# Altium PCB motherboard_ERC.PcbDoc
Units mm, origin at the board's own origin, x right, y up, seen from the top; angles counter-clockwise.
Board outline 153 x 126 mm, 2 copper layers (Top Layer, Bottom Layer); 17 components, 70 nets, 210 pads, 33 vias.
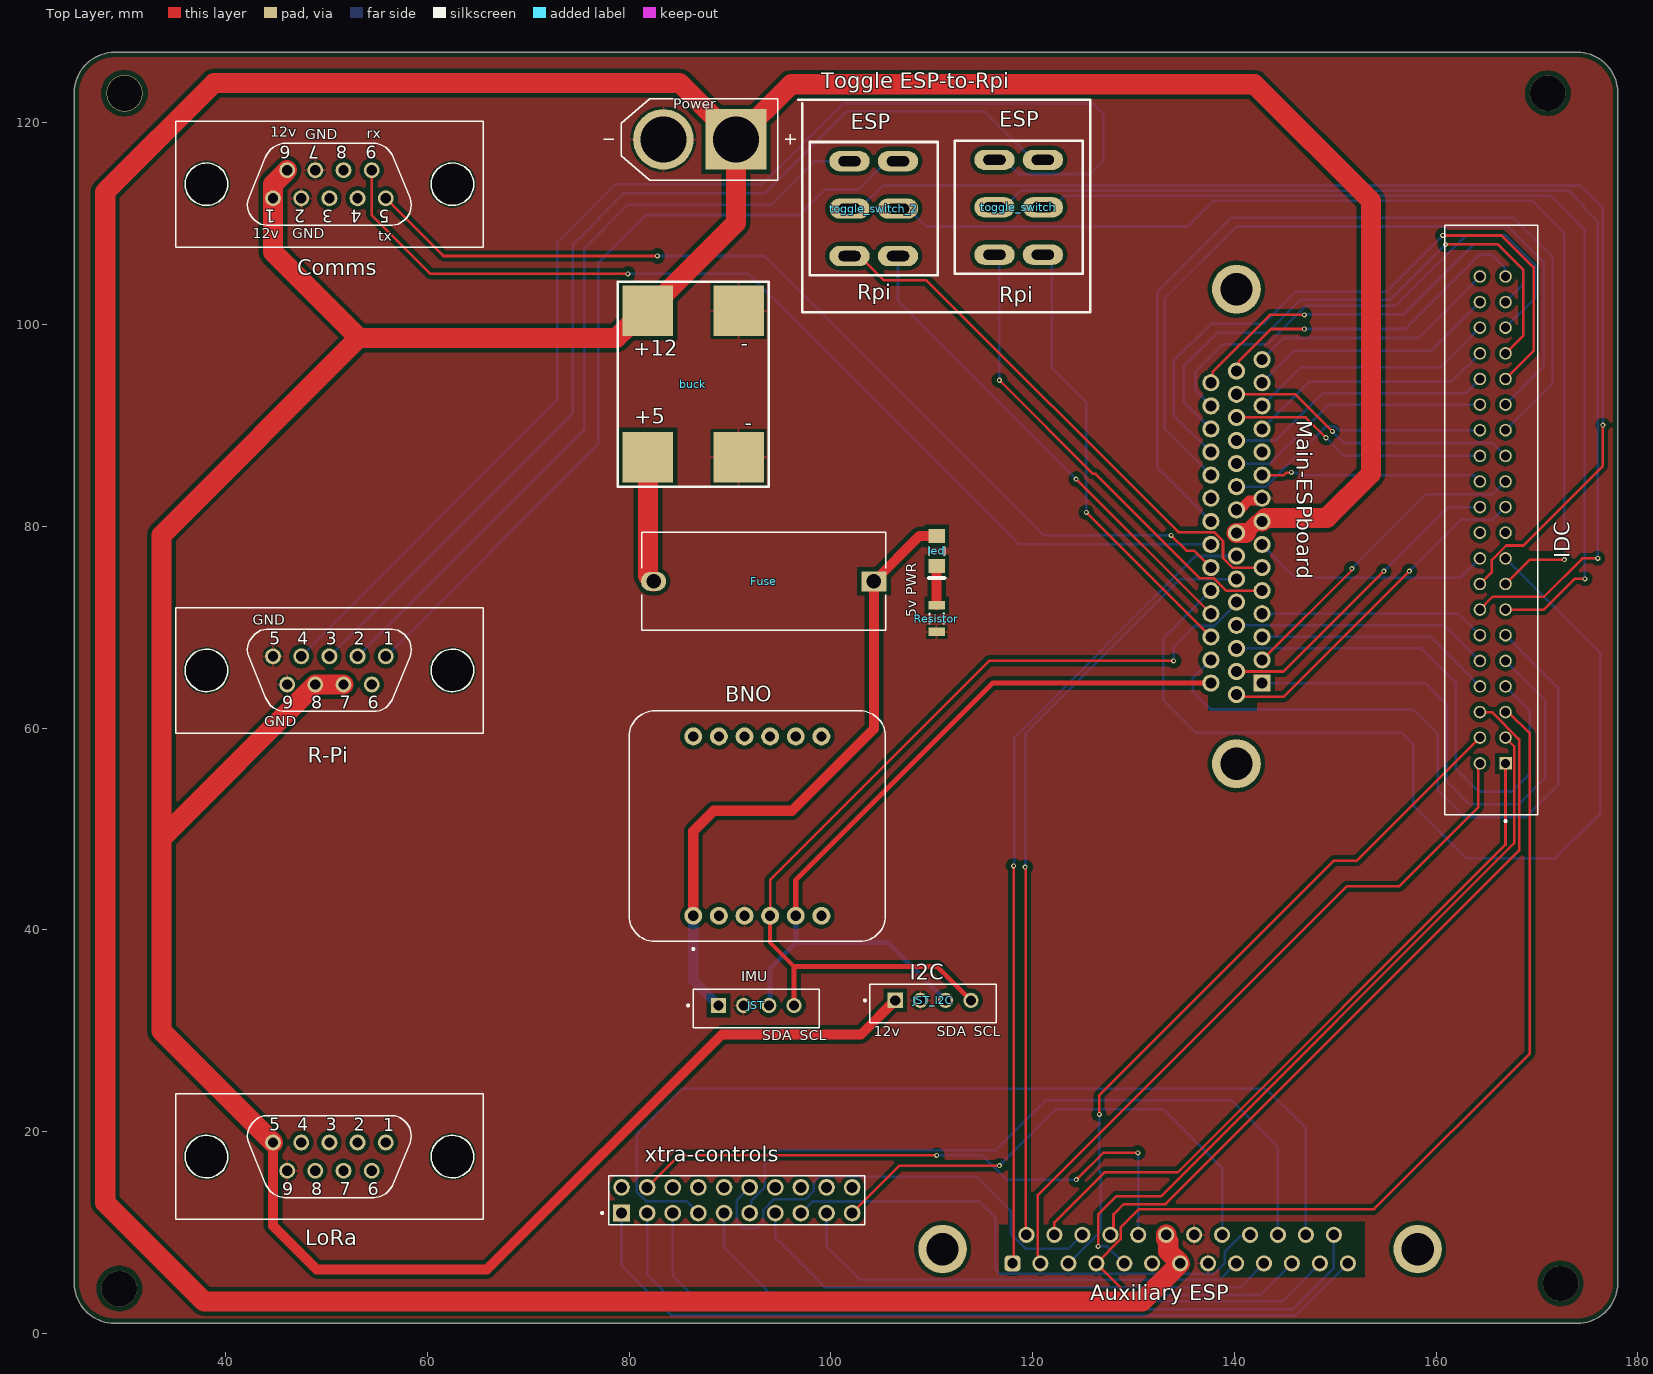
[diagram p0: Top Layer view]
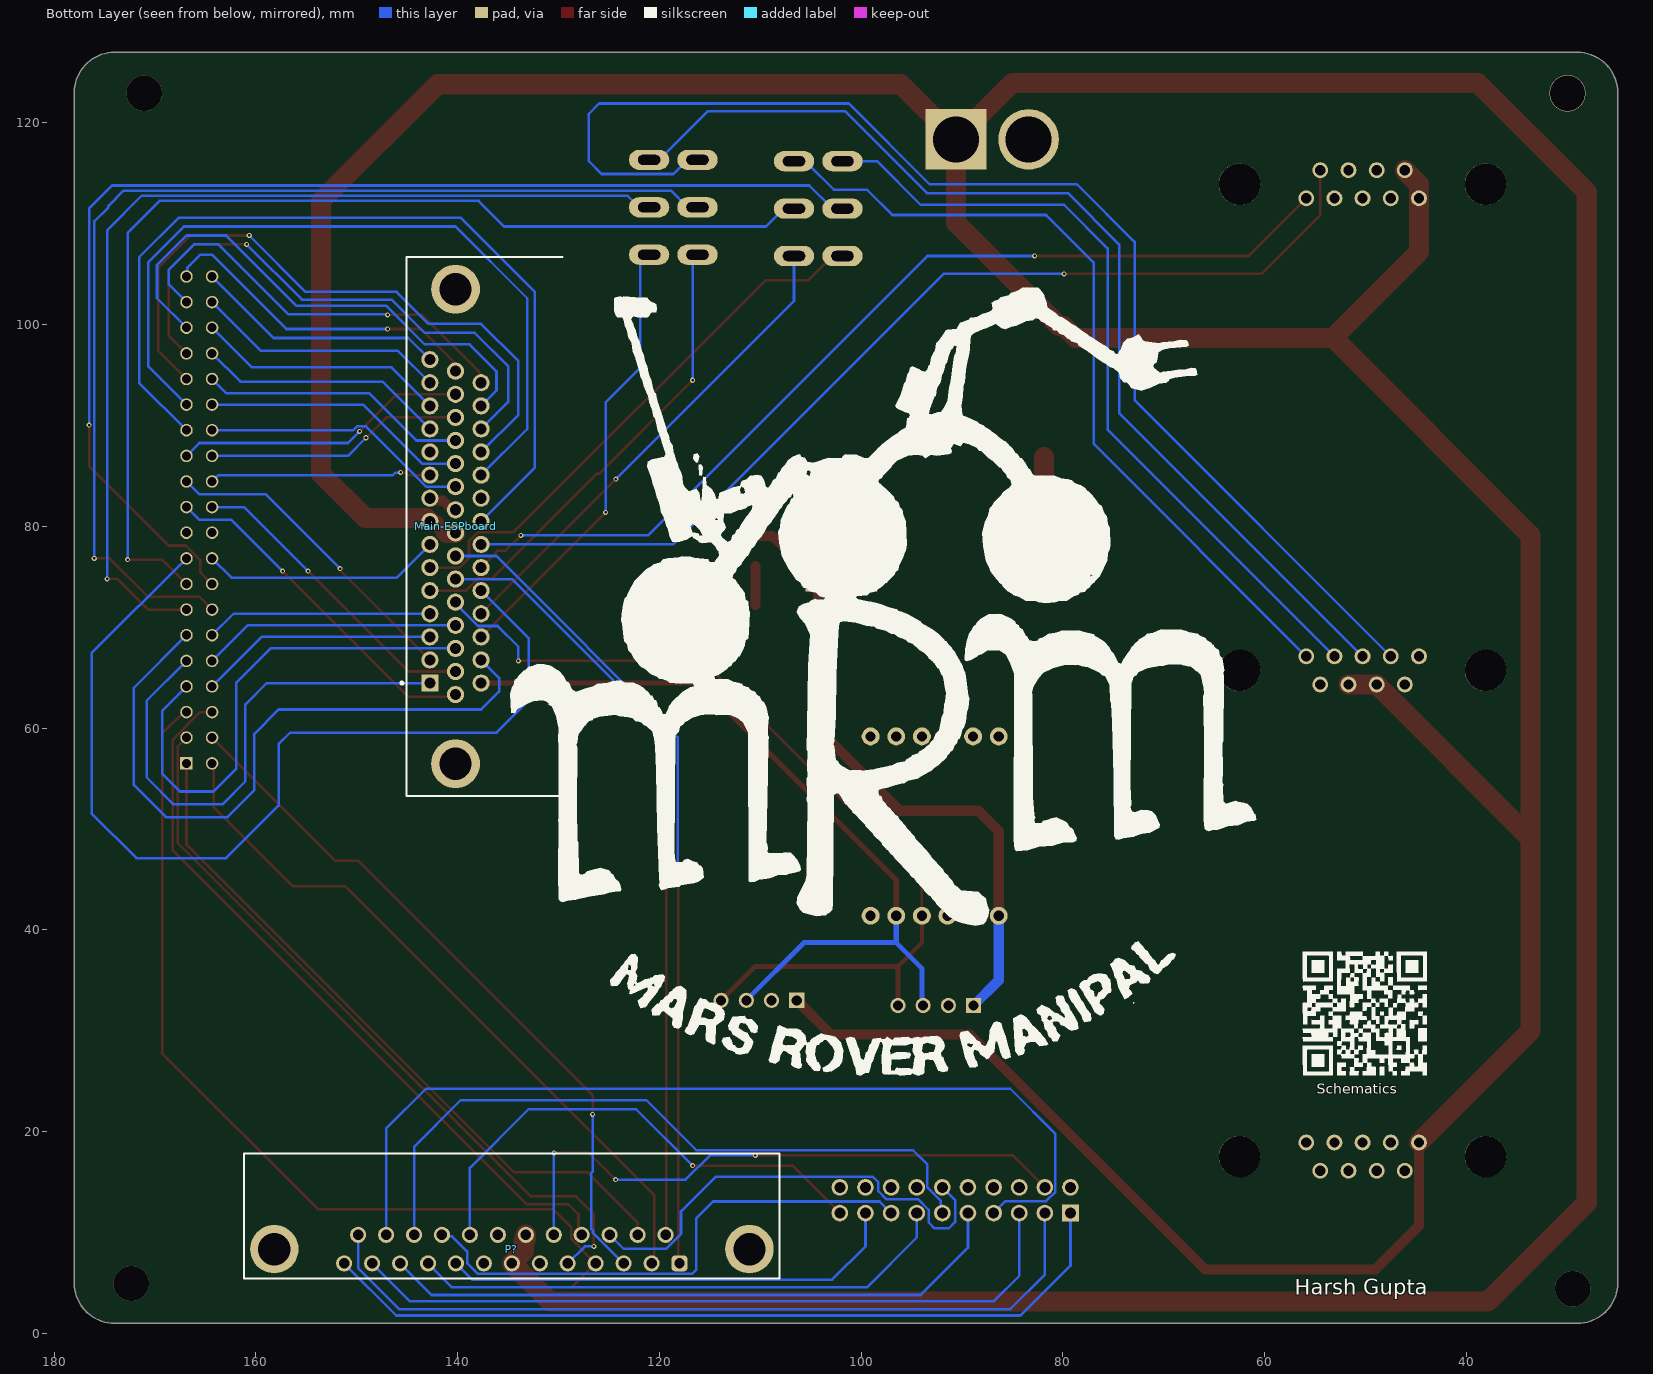
[diagram p1: Bottom Layer view, seen from below]

## Layer stack, top to bottom
Top Solder: solder mask 0.0102, Solder Resist, Dk 3.5
Top Layer: signal copper 0.0356
Dielectric 1: dielectric 0.32, FR-4, Dk 4.8
Bottom Layer: signal copper 0.0356
Bottom Solder: solder mask 0.0102, Solder Resist, Dk 3.5

## Board outline
25,5 ccw(c29,5) 29,1 174,1 ccw(c174,5) 178,5 178,123 ccw(c174,123) 174,127 29,127 ccw(c29,123) 25,123

## Design rules (kind name [scope] priority, off if disabled: settings)
Clearance [All] p1: gap=0.254 ignorepadtopadclearanceinfootprint=FALSE except(0.1: Arc-THPad Arc-Via Track-THPad Track-Via; 0.4: Arc-Fill Arc-Poly Arc-Region Track-Fill Track-Poly Track-Region SMDPad-Fill SMDPad-Poly SMDPad-Region THPad-Fill THPad-Poly THPad-Region; 0.5: Via-Fill Via-Poly Via-Region)
PolygonConnect [All] p1: connectstyle=Relief reliefconductorwidth=0.254 reliefentries=4 polygonreliefangle="90 Angle" airgapwidth=0.254
RoutingVias [All] p1: holewidth=0.711 width=1.27 viastyle="Through Hole" minholewidth=0.711 minwidth=1.27 maxholewidth=0.711 maxwidth=1.27
SolderMaskExpansion [All] p1: expansion=0.102 istentingtop=FALSE
SupplyNets "Schematic Supply Nets_1" [InNet('+12')] p1: voltage=0.000
SupplyNets "Schematic Supply Nets" [InNet('GND')] p2: voltage=0.000
Width [All] p1: maxlimit=2 minlimit=0.254 preferedwidth=0.254
30 further rules are at their usual default settings.

## Components (designator, comment, footprint, x,y, rotation, side; value= is the part's Value field where it differs from the comment)
BNO "4754" MODULE_4754 92.71,50.292 r0 top
buck "microbuck" "Micro buck" 86.36,94.107 r0 top
Comms "DB9F" D-09F 50.292,113.919 r180 top
Fuse "4527" FUSE_4527 93.345,74.549 r180 top
IDC "3-1761603-3" TE_3-1761603-3 166.878,56.515 r90 top
JST "IMU" JST_B4B-EH-A 92.603,32.512 r0 top
JST_I2C "IMU" JST_B4B-EH-A 110.129,33.02 r0 top
led "597-3311-407F" DIAL-597-3311-407F_V 110.49,77.563 r270 top
LoRa "DB9F" D-09F 50.292,17.526 r0 top
Main-ESPboard "L717HDB44PD1CH4F" FP-L717HDB44PD1CH4F-MFG 133.828,79.992 r90 bottom
P? "618025231221" 618025231221 134.625,11.659 r0 bottom
Power "XT60-M" AMASS_XT60-M 86.995,118.364 r180 top
R-Pi "DB9F" D-09F 50.292,65.722 r0 top
Resistor "RC1206FR-07120RL" RESC3116X65X40LL10T20 110.49,70.866 r270 top
toggle_switch "toggle switch" "toggle switch" 118.618,111.633 r180 top
toggle_switch_2 "toggle switch" "toggle switch" 104.254,111.505 r180 top
xtra-controls "10119109-920010LF" AMPHENOL_10119109-920010LF 90.678,13.208 r0 top

## Footprints (in the part's own frame and the unit in brackets; to place one, negate y for a bottom-side part, rotate by r counter-clockwise, add the part's x,y. Pads: shape width x height; smd on the part's side, far side on the other; paste and mask are expansions set on the pad)
618025231221 [mm] "25 pins, right angled, 8.08mm, with hex screw"
  rrect50% 1.6x1.6 hole 1.04: 1(-16.62,4.72)
  round 1.6 hole 1.04: 2(-13.85,4.72) 3(-11.08,4.72) 4(-8.31,4.72) 5(-5.54,4.72) 6(-2.77,4.72) 7(0,4.72) 8(2.77,4.72) 9(5.54,4.72) 10(8.31,4.72) 11(11.08,4.72) 12(13.85,4.72) 13(16.62,4.72) 14(-15.235,1.88) 15(-12.465,1.88) 16(-9.695,1.88) 17(-6.925,1.88) 18(-4.155,1.88) 19(-1.385,1.88) 20(1.385,1.88) 21(4.155,1.88) 22(6.925,1.88) 23(9.695,1.88) 24(12.465,1.88) 25(15.235,1.88)
  round 4.8 hole 3.2: M1(-23.55,3.3) M2(23.55,3.3)
  silkscreen extent -26.55,-6.2 26.55,6.2, body extent -26.55,-12.2 26.55,6.2, height 12.55
AMASS_XT60-M [mm]
  round 6 hole 4.55: N(3.6,0)
  rect 6x6 / inner round 6 / far side rect 6x6 hole 4.55: P(-3.6,0)
  silkscreen extent -9.5,-4.05 9.5,4.05, body extent -7.75,-4.05 7.75,4.05, height 16
AMPHENOL_10119109-920010LF [mm]
  rect 1.65x1.65 / inner round 1.65 / far side rect 1.65x1.65 hole 1.1: 01(-11.43,-1.27)
  round 1.65 hole 1.1: 02(-11.43,1.27) 03(-8.89,-1.27) 04(-8.89,1.27) 05(-6.35,-1.27) 06(-6.35,1.27) 07(-3.81,-1.27) 08(-3.81,1.27) 09(-1.27,-1.27) 10(-1.27,1.27) 11(1.27,-1.27) 12(1.27,1.27) 13(3.81,-1.27) 14(3.81,1.27) 15(6.35,-1.27) 16(6.35,1.27) 17(8.89,-1.27) 18(8.89,1.27) 19(11.43,-1.27) 20(11.43,1.27)
  silkscreen extent -13.45,-2.41 12.7,2.41
D-09F [mil]
  round 62 hole 40: 1(220,55) 2(110,55) 3(0,55) 4(-110,55) 5(-220,55) 6(165,-55) 7(55,-55) 8(-55,-55) 9(-165,-55)
  round 162 hole 162 unplated: ""(-480,0) ""(480,0)
  silkscreen extent -600,-245 600,245
DIAL-597-3311-407F_V [mm] "SMD, 2-Leads, Body 1.5x3mm"
  rect 1.42x1.6 smd: 1(-1.49,0) 2(1.49,0)
  silkscreen extent -0.38,-0.75 2.7,0.75, body extent -1.5,-0.75 1.5,0.75, height 1.5
FP-L717HDB44PD1CH4F-MFG [mm]
  rect 1.7x1.7 hole 1.1 paste-2539.97 mask+0: 1(-15.52,8.92)
  round 1.7 hole 1.1 paste-2539.97 mask+0: 2(-13.23,8.92) 3(-10.94,8.92) 4(-8.65,8.92) 5(-6.36,8.92) 6(-4.07,8.92) 7(-1.78,8.92) 8(0.51,8.92) 9(2.8,8.92) 10(5.09,8.92) 11(7.38,8.92) 12(9.67,8.92) 13(11.96,8.92) 14(14.25,8.92) 15(16.54,8.92) 16(-16.665,6.38) 17(-14.375,6.38) 18(-12.085,6.38) 19(-9.795,6.38) 20(-7.505,6.38) 21(-5.215,6.38) 22(-2.925,6.38) 23(-0.635,6.38) 24(1.655,6.38) 25(3.945,6.38) 26(6.235,6.38) 27(8.525,6.38) 28(10.815,6.38) 29(13.105,6.38) 30(15.395,6.38) 31(-15.52,3.84) 32(-13.23,3.84) 33(-10.94,3.84) 34(-8.65,3.84) 35(-6.36,3.84) 36(-4.07,3.84) 37(-1.78,3.84) 38(0.51,3.84) 39(2.8,3.84) 40(5.09,3.84) 41(7.38,3.84) 42(9.67,3.84) 43(11.96,3.84) 44(14.25,3.84)
  round 4.85 hole 3.2 paste-2539.97 mask+0: 45(-23.52,6.38) 46(23.52,6.38)
  silkscreen extent -26.71,-4.2 26.71,11.82, body extent -26.52,-11.03 26.52,11.07, height 12.93
FUSE_4527 [mm]
  rect 2.5x1.98 hole 1.45: 1(-10.92,0)
  oval 2.5x1.9 hole 1.45: 2(10.92,0)
  silkscreen extent -12.08,-4.85 12.08,4.85
JST_B4B-EH-A [mm]
  rect 1.508x1.508 / inner round 1.508 / far side rect 1.508x1.508 hole 1: 1(-3.75,0)
  round 1.508 hole 1: 2(-1.25,0) 3(1.25,0) 4(3.75,0)
  silkscreen extent -6.85,-2.2 6.25,1.6, body extent -6.25,-2.2 6.25,1.6, height 6
"Micro buck" [mm]
  rect 5x5 smd: 1(-4.5,7.25) 2(4.5,7.25) 3(-4.5,-7.25) 4(4.5,-7.25)
  silkscreen extent -7.5,-10.16 7.5,10.16
MODULE_4754 [mil]
  round 70 hole 39.37: JP1_1(-250,-350) JP1_2(-150,-350) JP1_3(-50,-350) JP1_4(50,-350) JP1_5(150,-350) JP1_6(250,-350) JP2_1(-250,350) JP2_2(-150,350) JP2_3(-50,350) JP2_4(50,350) JP2_5(150,350) JP2_6(250,350)
  silkscreen extent -500,-483 500,450
RESC3116X65X40LL10T20 [mm] "Chip Resistor, 2-Leads, Body 3.10x1.60mm, IPC High Density"
  rect 0.85x1.6 smd: 1(-1.325,0) 2(1.325,0)
  silkscreen extent -0.5,-0.7 0.5,0.7, body extent -1.6,-0.85 1.6,0.85, height 0.65
TE_3-1761603-3 [mm]
  rect 1.24x1.24 hole 0.89: 1(0,0)
  round 1.24 hole 0.89: 2(0,2.54) 3(2.54,0) 4(2.54,2.54) 5(5.08,0) 6(5.08,2.54) 7(7.62,0) 8(7.62,2.54) 9(10.16,0) 10(10.16,2.54) 11(12.7,0) 12(12.7,2.54) 13(15.24,0) 14(15.24,2.54) 15(17.78,0) 16(17.78,2.54) 17(20.32,0) 18(20.32,2.54) 19(22.86,0) 20(22.86,2.54) 21(25.4,0) 22(25.4,2.54) 23(27.94,0) 24(27.94,2.54) 25(30.48,0) 26(30.48,2.54) 27(33.02,0) 28(33.02,2.54) 29(35.56,0) 30(35.56,2.54) 31(38.1,0) 32(38.1,2.54) 33(40.64,0) 34(40.64,2.54) 35(43.18,0) 36(43.18,2.54) 37(45.72,0) 38(45.72,2.54) 39(48.26,0) 40(48.26,2.54)
  silkscreen extent -5.83,-3.18 53.34,6.04
"toggle switch" [mm]
  oval 4x2 hole 1 slot 2.2 at 0 deg: 1(-2.4,4.7) 2(-2.4,0) 3(-2.4,-4.7) 4(2.4,4.7) 5(2.4,0) 6(2.4,-4.7)
  silkscreen extent -6.35,-6.6 6.35,6.6

## Part data
BNO: "Adafruit 9-DOF Orientation IMU Fusion Breakout - BNO085 (BNO080) - STEMMA QT / Qwiic", Package=None, Availability="In Stock", Check_prices=https://www.snapeda.com/parts/4754/Adafruit+Industries/view-part/?ref=eda, MF=Adafruit, MP=4754, Price=None, Purchase-URL=https://pricing.snapeda.com/search/part/4754/?ref=eda, SnapEDA_Link=https://www.snapeda.com/parts/4754/Adafruit+Industries/view-part/?ref=snap
Comms LoRa R-Pi: "Adapter Connector D-Sub, 9 Pin Female To Modular, Female Jack, 8p8c _RJ45_ Beige", Package=None, Availability=Unavailable, MF="Assmann WSW", MP=DB9F, Price=None, SnapEDA_Link=https://www.snapeda.com/parts/DB9F/Assmann%20WSW%20Components/view-part/558712/?ref=snap
Fuse: "Fuseholder; 5 A; 250 V; Nylon; Base only; Brass, Tin Plate (Contact)", Package=None, Availability=Unavailable, MP=4527, Price=None
IDC: "AMP-LATCH 40 Position 2.54 mm Dual Row Through-Hole Straight Pin Header", Package=None, Availability=Unavailable, Centerline_Pitch="2.54 mm[.1 in]", DigiKey-Purchase-URL=https://snapeda.com/shop?store=DigiKey&id=379325, EU_RoHS_Compliance=Compliant, MF="TE Connectivity", MP=3-1761603-3, Number_of_Positions=40, Price=None, Product_Type=Connector, SnapEDA_Link=https://www.snapeda.com/parts/3-1761603-3/TE%20Connectivity%20AMP%20Connectors/view-part/379325/?ref=snap
JST JST_I2C: library part B4B-EH-A, "Connector Header Through Hole 4 position 0.098 (2.50mm)", Package=None, Check_prices=https://www.snapeda.com/parts/B4B-EH-A/JST/view-part/?ref=eda, MF=JST, MP=B4B-EH-A, SnapEDA_Link=https://www.snapeda.com/parts/B4B-EH-A/JST/view-part/?ref=snap
led: library part CMP-2000-05651-1, "LED Green, 75 mW, 30 mA, -30 to 85 degC, 2-Pin SMD, RoHS, Tape and Reel", Emitting Color=YellowGreen, Forward Current=30mA, Forward Voltage=2.5V, Manufacturer=Dialight, Operating Temp Range=-30Cto85C, Operating Temperature Classification=Commercial, Package Description="2-Pin Surface Mount Device, Body 1.5 x 3 mm", Package Type=SMD, Power Dissipation=75W, Reverse Voltage=4V, Test Current (It)=20mA, Chip Material=GaP, Datasheet URL=https://datasheet.ciiva.com/15117/getdatasheetpartid-142484-15117764.pdf, Datasheet Version=07/2002, DELETED=Compliant, High Brightness=No, Lens Dimensions=2x1.5x0.9mm, Lens Type=NonDiffused, Lum Intensity=7.5mcd, Luminous Intensity=7.5mcd, Main Category=ChipLED, Manufacturer URL=http://www.dialight.com/, Mounting=SurfaceMount, Mounting Technology=SurfaceMount, Number of  Elements=1, Package Reference=597-3311-407F, Packaging=TapeandReel, Peak Wavelength=560nm, Pin Count=2, Product Depth (mm)=1.5mm, Product Height (mm)=1.5mm, Product Length (mm)=3mm, Rad Hardened=No, Shape Type=Rectangular, Type=Uni-Color, Viewing Angle=70deg
Main-ESPboard: library part CMP-02362-000001-1, "CONN DSUB HD PLUG 44POS R/A SLDR", Current Rating=3A, Max Operating Temperature=105°C, Min Operating Temperature=-55°C, Package Quantity=50, Voltage Rating=250V, Body Material=Steel, Connector Type=D-Sub, Contact Material=Brass, Contact Plating=Gold, Depth=22.22mm, Gender=Male, Housing Material=Thermoplastic, Length=53.09mm, Mount="Through Hole", Number of Contacts=44, Number of Ports=1, Number of Positions=44, Number of Rows=3, Number of Terminals=44, Orientation="Right Angle", Packaging=Tray, Termination=Solder, Width=12.55mm
P?: library part CMP-1502-00286-2, Contact Resistance=30mΩ, Current Rating=3A, Insulation Resistance=5GΩ, Max Operating Temperature=105°C, Min Operating Temperature=-55°C, Operating Supply Voltage=125V, Contact Plating=Gold, Depth=18.5mm, Gender=Male, Housing Material=Steel, Insulation Material=PBT, Length=53.1mm, Mount="Through Hole", NexarPartId=18818208, Number of Contacts=25, Number of Pins=25, Number of Rows=2, Orientation="Right Angle", Pitch=2.77mm, REACH SVHC=Unknown, RoHS=Compliant, Termination=SMD/SMT, Voltage Rating=125V, Width=12.5mm
Power: "Plug; DC supply; XT60; male; PIN: 2; for cable; soldered; 30A; 500V", Package=Package, Check_prices=https://www.snapeda.com/parts/XT60-M/AMASS/view-part/?ref=eda, MF=AMASS, MP=XT60-M, SnapEDA_Link=https://www.snapeda.com/parts/XT60-M/AMASS/view-part/?ref=snap
Resistor: library part CMP-2000-06965-1, "Chip Resistor, 120 Ohm, +/- 1%, 250 mW, -55 to 155 degC, 1206 (3216 Metric), RoHS, Tape and Reel", Manufacturer=Yageo, Package Description="2-Pin Surface Mount Device, Body 3.1 x 1.6 mm", Package Reference=1206, Power Rating=250mW, Resistance=120ohm, Resistance Tolerance=±1%, Resistor Case Style=1206[3216Metric], Resistor Element Type=ThickFilm, Temperature Coefficient=±100ppm/°C, Voltage Rating=200V, Datasheet URL=http://www.yageo.com/documents/recent/PYu-RC_Group_51_RoHS_L_7.pdf, Datasheet Version="Rev. 7, 05/2017", Manufacturer URL=http://www.yageo.com/, Mounting Technology=SurfaceMount, MSL=MSL1-Unlimited, Packaging=CutTape, Product Range=RCSeries, SVHC=ToBeAdvised
xtra-controls: Package=None, Availability="In Stock", Check_prices=https://www.snapeda.com/parts/10119109-920010LF/Amphenol/view-part/?ref=eda, MF=Amphenol, MP=10119109-920010LF, Price=None, Purchase-URL=https://pricing.snapeda.com/search/part/10119109-920010LF/?ref=eda, SnapEDA_Link=https://www.snapeda.com/parts/10119109-920010LF/Amphenol/view-part/?ref=snap

## Via types
v1: diameter 0.5, hole 0.25, Top Layer to Bottom Layer, 29 vias
v2: diameter 3.5, hole 3.5, Top Layer to Bottom Layer, tented both sides, 3 vias
v3: diameter 3.6, hole 3.5, Top Layer to Bottom Layer, tented both sides, 1 vias

## Nets (pads, with @x,y where several pads share a name; then routed paths per layer and width w, separated by ;. In a path a pad name is that pad's centre, name@x,y a point inside that pad or via, vN(x,y) a via of type N, cw(c..) or ccw(c..) an arc to the next point about the centre after c; other vN are vias at no path point)
+12: buck.1 Comms.1 Comms.6 JST_I2C.1 LoRa.5 Main-ESPboard.8 Main-ESPboard.23 P?.7 P?.19 Power.P R-Pi.7 R-Pi.8 | length 668.6
  Top Layer w1: LoRa.5 44.704,10.668 49.022,6.35 65.913,6.35 89.201,29.638 102.997,29.638 JST_I2C.1
  Top Layer w1.5: 141.135,79.357 142.28,80.502 Main-ESPboard.8
  Top Layer w2: LoRa.5 33.655,29.972 33.655,49.085 ; Comms.6 44.704,113.919 Comms.1 44.704,107.188 53.202,98.69 ; R-Pi.7 R-Pi.8 33.655,49.085 ; P?.19 133.24,9.371 133.444,9.167 133.444,8.12 P?.7 130.861,3.175 37.846,3.175 28.067,12.954 28.067,113.157 38.862,123.952 85.007,123.952 Power.P ; Main-ESPboard.23 141.135,79.357 ; Main-ESPboard.8 143.088,80.842 149.168,80.842 153.543,85.217 153.543,112.268 141.986,123.825 96.056,123.825 Power.P ; 33.655,49.085 33.655,79.143 53.202,98.69 ; 53.202,98.69 78.751,98.69 79.918,99.857 80.36,99.857 buck.1 90.595,110.092 Power.P
"DIR 1": IDC.39 Main-ESPboard.30 | length 33.2
  Top Layer w0.254: Main-ESPboard.30@140.448,95.627 140.448,96.379 143.637,99.568 v1(146.939,99.568)
  Bottom Layer w0.254: Main-ESPboard.30 Main-ESPboard.30@140.448,95.627 ; v1(146.939,99.568) 156.972,99.568 164.338,106.934 165.481,106.934 166.805,105.61 166.805,104.848 IDC.39
"DIR 2": IDC.37 Main-ESPboard.44 | length 42.1
  Top Layer w0.254: Main-ESPboard.44@137.844,94.418 137.844,95.299 143.51,100.965 v1(146.939,100.965)
  Bottom Layer w0.254: Main-ESPboard.44 Main-ESPboard.44@137.844,94.418 ; v1(146.939,100.965) 146.986,101.012 156.765,101.012 163.703,107.95 166.116,107.95 168.656,105.41 168.656,104.013 IDC.37
"DIR 3": IDC.35 Main-ESPboard.43 | length 51.9
  Bottom Layer w0.254: Main-ESPboard.43 136.144,93.476 136.144,95.377 138.811,98.044 143.256,98.044 147.066,101.854 155.956,101.854 162.941,108.839 166.878,108.839 169.799,105.918 169.799,102.616 IDC.35
"DIR 4": IDC.33 Main-ESPboard.42 | length 56
  Top Layer w0.254: v1(160.909,107.95) 166.116,107.95 168.656,105.41 168.656,98.933 IDC.33
  Bottom Layer w0.254: Main-ESPboard.42 135.001,92.329 135.001,95.885 138.303,99.187 143.256,99.187 146.558,102.489 155.448,102.489 v1(160.909,107.95)
"DIR 5": IDC.31 Main-ESPboard.41 | length 64.9
  Top Layer w0.254: v1(160.655,108.839) 166.497,108.839 169.672,105.664 169.672,97.409 IDC.31
  Bottom Layer w0.254: Main-ESPboard.41 133.985,91.055 133.985,96.393 137.668,100.076 142.875,100.076 146.05,103.251 155.067,103.251 v1(160.655,108.839)
"DIR 6": IDC.29 Main-ESPboard.40 | length 77.1
  Bottom Layer w0.254: Main-ESPboard.40 133.096,89.654 133.096,102.616 140.208,109.728 167.132,109.728 170.688,106.172 170.688,95.885 IDC.29
"DIR 7": IDC.27 Main-ESPboard.38 | length 88
  Bottom Layer w0.254: Main-ESPboard.38 132.334,85.836 132.334,103.251 139.7,110.617 167.64,110.617 171.577,106.68 171.577,94.234 IDC.27
"DIR 8": IDC.17 Main-ESPboard.35 | length 97.2
  Bottom Layer w0.254: Main-ESPboard.35 132.969,68.933 132.969,62.738 136.144,59.563 156.591,59.563 157.734,58.42 157.734,52.324 162.941,47.117 171.831,47.117 176.276,51.562 176.276,67.437 IDC.17
"DIR 9": Main-ESPboard.34 toggle_switch_2.1 | length 48.3
  Top Layer w0.254: v1(124.317,84.693) Main-ESPboard.34
  Bottom Layer w0.254: toggle_switch_2.1 106.654,102.356 v1(124.317,84.693)
"DIR 10": Main-ESPboard.33 toggle_switch.1 | length 44.8
  Top Layer w0.254: v1(125.331,81.389) Main-ESPboard.33
  Bottom Layer w0.254: toggle_switch.1 121.084,106.933 121.891,106.126 121.891,95.742 125.331,92.302 v1(125.331,81.389)
"DIR 11": IDC.11 Main-ESPboard.32 | length 66.8
  Bottom Layer w0.254: Main-ESPboard.32 135.89,64.984 135.89,63.627 137.668,61.849 157.734,61.849 160.147,59.436 160.147,53.848 162.814,51.181 168.91,51.181 172.085,54.356 172.085,64.008 IDC.11
"DIR 12": IDC.9 Main-ESPboard.1 | length 51.8
  Bottom Layer w0.254: Main-ESPboard.1 158.921,64.472 161.036,62.357 161.036,54.737 163.322,52.451 168.148,52.451 170.815,55.118 170.815,62.738 IDC.9
"DIR 13": IDC.7 Main-ESPboard.18 | length 50.3
  Bottom Layer w0.254: Main-ESPboard.18 158.534,67.907 161.925,64.516 161.925,56.007 164.211,53.721 167.513,53.721 169.291,55.499 169.291,61.722 IDC.7
"DIR 14": IDC.5 P?.4 | length 90.6
  Top Layer w0.254: 128.712,4.556 128.698,4.556 P?.4 128.727,9.351 128.727,10.49 130.556,12.319 153.852,12.319 169.291,27.758 169.291,59.449 167.145,61.595 IDC.5
"DIR 15": IDC.3 P?.5 | length 73.8
  Top Layer w0.254: v1(126.492,8.636) 126.492,11.811 128.27,13.589 132.721,13.589 167.725,48.593 167.725,58.208 IDC.3
  Bottom Layer w0.254: v1(126.492,8.636) 127.388,8.636 P?.5
"DIR 16": IDC.1 P?.15 | length 69.5
  Top Layer w0.254: P?.15 122.16,11.018 127.114,15.972 134.386,15.972 166.878,48.464 IDC.1
GND: BNO.JP1_3 buck.2 buck.4 Comms.2 Comms.7 JST.2 JST_I2C.2 LoRa.9 Main-ESPboard.9 Main-ESPboard.24 P?.8 P?.20 Power.N R-Pi.5 R-Pi.9 Resistor.2 | length 3
  Top Layer w1: Main-ESPboard.24 140.533,81.647 141.448,82.562 142.518,82.562 Main-ESPboard.9
"IN 1": IDC.26 Main-ESPboard.28 | length 25.7
  Top Layer w0.254: Main-ESPboard.28 147.064,90.807 v1(149.082,88.789)
  Bottom Layer w0.254: v1(149.082,88.789) 150.876,86.995 IDC.26
"IN 2": IDC.25 Main-ESPboard.29 | length 29.2
  Top Layer w0.254: Main-ESPboard.29 146.044,93.097 v1(149.717,89.424)
  Bottom Layer w0.254: v1(149.717,89.424) 150.876,88.265 165.608,88.265 IDC.25
"IN 3": IDC.24 Main-ESPboard.10 | length 22.1
  Top Layer w0.254: Main-ESPboard.10@142.752,85.086 144.895,85.086 145.122,85.313 145.606,85.313 v1(145.653,85.36)
  Bottom Layer w0.254: v1(145.653,85.36) 145.7,85.313 146.188,85.313 146.411,85.09 163.703,85.09 IDC.24
"IN 4": IDC.23 Main-ESPboard.2 | length 31.6
  Top Layer w0.254: Main-ESPboard.2 151.591,75.605 151.591,75.772 v1(151.638,75.819)
  Bottom Layer w0.254: v1(151.638,75.819) 159.004,83.185 165.608,83.185 IDC.23
"IN 5": IDC.22 Main-ESPboard.17 | length 30.9
  Top Layer w0.254: Main-ESPboard.17 144.865,65.617 v1(154.813,75.565)
  Bottom Layer w0.254: v1(154.813,75.565) 161.163,81.915 IDC.22
"IN 6": IDC.21 Main-ESPboard.16 | length 34.5
  Top Layer w0.254: Main-ESPboard.16 140.416,63.119 144.907,63.119 v1(157.353,75.565)
  Bottom Layer w0.254: v1(157.353,75.565) 162.433,80.645 165.608,80.645 IDC.21
NetBNO_JP1_1: BNO.JP1_1 Fuse.1 JST.1 led.1 | length 63.1
  Top Layer w1: BNO.JP1_1 86.36,49.784 88.392,51.816 96.139,51.816 104.265,59.942 Fuse.1 108.769,79.053 led.1
  Bottom Layer w1: BNO.JP1_1 86.36,35.005 JST.1
NetBNO_JP1_4: BNO.JP1_4 JST.4 JST_I2C.4 Main-ESPboard.20 | length 90.9
  Top Layer w0.254: BNO.JP1_4 93.98,44.958 115.697,66.675 v1(133.985,66.675)
  Top Layer w0.4: BNO.JP1_4 93.98,38.735 96.353,36.362
  Top Layer w0.5: JST.4 96.353,36.362 110.537,36.362 JST_I2C.4
  Bottom Layer w0.254: v1(133.985,66.675) 133.985,68.072 136.042,70.129 137.978,70.129 140.208,72.359 Main-ESPboard.20
NetBNO_JP1_5: BNO.JP1_5 JST.3 JST_I2C.3 Main-ESPboard.31 | length 80
  Top Layer w0.5: BNO.JP1_5 96.52,44.958 116.034,64.472 Main-ESPboard.31
  Bottom Layer w0.5: JST.3 93.98,32.639 93.98,36.195 96.52,38.735 ; BNO.JP1_5 96.52,38.735 ; JST_I2C.3 105.664,38.735 96.52,38.735
Netbuck_3: buck.3 Fuse.2 | length 12.5
  Top Layer w2: buck.3 81.86,75.114 Fuse.2
NetComms_5: Comms.5 Main-ESPboard.36 | length 96.9
  Top Layer w0.254: Comms.5 61.595,106.807 v1(82.804,106.807) ; v1(133.731,79.121) 135.255,77.597 135.993,77.597 Main-ESPboard.36
  Bottom Layer w0.254: v1(82.804,106.807) 93.439,106.807 121.125,79.121 v1(133.731,79.121)
NetComms_9: Comms.9 Main-ESPboard.37 | length 101.2
  Top Layer w0.254: Comms.9 54.483,110.871 60.325,105.029 v1(79.883,105.029)
  Bottom Layer w0.254: v1(79.883,105.029) 91.821,105.029 118.638,78.212 Main-ESPboard.37
NetIDC_13: IDC.13 toggle_switch.2 | length 99.3
  Top Layer w0.254: IDC.13 170.688,71.755 173.736,74.803 v1(174.752,74.803)
  Bottom Layer w0.254: toggle_switch.2 122.018,111.633 123.161,112.776 171.323,112.776 174.752,109.347 v1(174.752,74.803)
NetIDC_14: IDC.14 toggle_switch.5 | length 109
  Top Layer w0.254: IDC.14 165.608,73.025 170.688,73.025 174.498,76.835 v1(176.022,76.835)
  Bottom Layer w0.254: toggle_switch.5 117.218,111.633 118.869,113.284 173.101,113.284 174.625,111.76 174.625,111.633 176.022,110.236 v1(176.022,76.835)
NetIDC_15: IDC.15 toggle_switch_2.2 | length 108.4
  Top Layer w0.254: IDC.15 169.291,76.708 v1(172.72,76.708)
  Bottom Layer w0.254: toggle_switch_2.2 107.654,111.505 109.431,109.728 135.382,109.728 137.922,112.268 169.545,112.268 172.72,109.093 v1(172.72,76.708)
NetIDC_16: IDC.16 toggle_switch_2.5 | length 119.8
  Top Layer w0.254: IDC.16 165.527,75.484 165.527,76.682 166.95,78.105 168.656,78.105 176.53,85.979 v1(176.53,90.043)
  Bottom Layer w0.254: toggle_switch_2.5 102.854,111.505 105.141,113.792 174.244,113.792 176.53,111.506 v1(176.53,90.043)
Netled_2: led.2 Resistor.1 | length 3.9
  Top Layer w1: Resistor.1 led.2
NetMain-ESPboard_21: Main-ESPboard.21 P?.14 | length 77
  Top Layer w0.254: v1(119.253,46.228) 119.3,46.181 119.3,9.869 P?.14
  Bottom Layer w0.254: v1@119.294,46.228 119.294,59.477 134.594,74.777 Main-ESPboard.21
NetMain-ESPboard_22: Main-ESPboard.22 P?.1 | length 81.7
  Top Layer w0.254: P?.1 118.11,7.044 v1(118.11,46.355)
  Bottom Layer w0.254: v1@118.182,46.355 118.182,59.083 136.166,77.067 Main-ESPboard.22
NetMain-ESPboard_39: Main-ESPboard.39
NetP?_9: P?.9 xtra-controls.17 | length 45.9
  Bottom Layer w0.254: xtra-controls.17 99.568,8.636 102.87,5.334 138.56,5.334 P?.9
NetP?_10: P?.10 xtra-controls.13 | length 53.9
  Bottom Layer w0.254: xtra-controls.13 94.488,9.525 99.441,4.572 140.568,4.572 P?.10
NetP?_11: P?.11 xtra-controls.09 | length 63
  Bottom Layer w0.254: xtra-controls.09 89.408,8.509 94.107,3.81 142.576,3.81 P?.11
NetP?_12: P?.12 xtra-controls.05 | length 73
  Bottom Layer w0.254: xtra-controls.05 84.328,5.715 86.868,3.175 144.711,3.175 P?.12
NetP?_13: P?.13 xtra-controls.01 | length 81.4
  Bottom Layer w0.254: xtra-controls.01 79.248,6.731 84.201,1.778 146.084,1.778 P?.13
NetP?_16: P?.16 xtra-controls.12 | length 46.7
  Bottom Layer w0.254: xtra-controls.12 90.678,13.208 90.678,11.049 91.313,10.414 92.71,10.414 93.298,11.002 93.298,12.236 94.379,13.317 97.518,13.317 98.298,14.097 98.298,14.986 98.842,15.53 114.427,15.53 117.856,12.101 117.856,9.861 119.335,8.382 123.533,8.382 P?.16
NetP?_18: P?.18 xtra-controls.04 | length 60.2
  Top Layer w0.254: xtra-controls.04 84.963,17.653 v1(110.49,17.653) ; v1(124.333,15.24) 127,17.907 v1(130.429,17.907)
  Bottom Layer w0.254: v1(110.49,17.653) 114.979,17.653 117.392,15.24 v1(124.333,15.24) ; v1(130.429,17.907) 130.449,17.887 130.449,9.799 P?.18
NetP?_21: P?.21 xtra-controls.19 | length 50
  Top Layer w0.254: xtra-controls.19 106.807,16.637 v1(116.713,16.637)
  Bottom Layer w0.254: v1(116.713,16.637) 122.301,22.225 132.969,22.225 138.78,16.414 P?.21
NetP?_22: P?.22 xtra-controls.15 | length 53.2
  Bottom Layer w0.254: xtra-controls.15 98.171,13.081 114.681,13.081 116.332,11.43 116.332,6.35 116.77,5.912 137.992,5.912 139.065,6.985 139.065,8.128 140.552,9.615 141.386,9.615 P?.22
NetP?_23: P?.23 xtra-controls.11 | length 69.6
  Bottom Layer w0.254: xtra-controls.11 92.102,12.092 92.102,13.144 93.436,14.478 93.436,16.728 94.869,18.161 116.332,18.161 121.285,23.114 139.7,23.114 144.32,18.494 P?.23
NetP?_24: P?.24 xtra-controls.07 | length 93.1
  Bottom Layer w0.254: xtra-controls.07 85.682,13.124 81.655,13.124 80.736,14.042 80.736,19.776 85.217,24.257 143.129,24.257 147.09,20.296 P?.24
NetP?_25: P?.25 xtra-controls.03 | length 80.6
  Bottom Layer w0.254: xtra-controls.03 81.788,5.842 85.217,2.413 145.796,2.413 149.86,6.477 P?.25
NetR-Pi_1: R-Pi.1 toggle_switch_2.3 | length 81.6
  Bottom Layer w0.254: R-Pi.1 76.962,88.201 76.962,106.172 81.661,110.871 96.901,110.871 99.401,113.371 102.703,113.371 105.221,115.889 106.338,115.889 toggle_switch_2.3
NetR-Pi_2: R-Pi.2 toggle_switch_2.6 | length 79.6
  Bottom Layer w0.254: R-Pi.2 75.565,89.599 75.565,107.569 79.883,111.887 94.107,111.887 98.425,116.205 toggle_switch_2.6
NetR-Pi_3: R-Pi.3 toggle_switch.3 | length 104.9
  Bottom Layer w0.254: R-Pi.3 74.422,91.249 74.422,107.95 79.502,113.03 93.472,113.03 101.6,121.158 115.193,121.158 120.018,116.333 toggle_switch.3
NetR-Pi_4: R-Pi.4 toggle_switch.6 | length 129.4
  Bottom Layer w0.254: R-Pi.4 72.898,92.519 72.898,108.204 78.613,113.919 93.218,113.919 101.219,121.92 125.984,121.92 127,120.904 127,116.205 125.73,114.935 118.616,114.935 117.218,116.333 toggle_switch.6 toggle_switch.6@115.218,116.333
"PWM 1": IDC.40 Main-ESPboard.15 | length 25
  Bottom Layer w0.254: Main-ESPboard.15 144.895,98.679 158.242,98.679 IDC.40
"PWM 2": IDC.38 Main-ESPboard.14 | length 24.9
  Bottom Layer w0.254: Main-ESPboard.14 145.915,97.409 159.512,97.409 IDC.38
"PWM 3": IDC.36 Main-ESPboard.13 | length 24.8
  Bottom Layer w0.254: Main-ESPboard.13 146.554,95.758 160.401,95.758 IDC.36
"PWM 4": IDC.34 Main-ESPboard.12 | length 24.7
  Bottom Layer w0.254: Main-ESPboard.12 147.447,94.361 161.544,94.361 IDC.34
"PWM 5": IDC.32 Main-ESPboard.27 | length 26.7
  Bottom Layer w0.254: Main-ESPboard.27 144.081,88.517 148.782,93.218 162.941,93.218 IDC.32
"PWM 6": IDC.30 Main-ESPboard.26 | length 26.6
  Bottom Layer w0.254: Main-ESPboard.26 143.509,86.227 149.356,92.075 IDC.30
"PWM 7": IDC.28 Main-ESPboard.25 | length 26.8
  Bottom Layer w0.254: Main-ESPboard.25 143.126,83.937 149.121,89.932 149.927,89.932 150.324,89.535 IDC.28
"PWM 8": IDC.18 Main-ESPboard.7 | length 23.7
  Bottom Layer w0.254: Main-ESPboard.7 146.03,74.93 162.433,74.93 IDC.18
"PWM 9": Main-ESPboard.6 toggle_switch_2.4 | length 54.7
  Top Layer w0.254: toggle_switch_2.4 102.854,106.805 105.265,104.394 109.474,104.394 134.443,79.425 137.978,79.425 138.87,78.533 138.87,76.882 139.83,75.922 Main-ESPboard.6
"PWM 10": Main-ESPboard.5 toggle_switch.4 | length 47.3
  Top Layer w0.254: v1(116.713,94.488) 125.984,85.217 126.238,85.217 136.61,74.845 137.978,74.845 139.191,73.632 Main-ESPboard.5
  Bottom Layer w0.254: toggle_switch.4 116.713,106.438 v1(116.713,94.488)
"PWM 11": IDC.12 Main-ESPboard.4 | length 22.5
  Bottom Layer w0.254: Main-ESPboard.4 162.211,71.342 IDC.12
"PWM 12": IDC.10 Main-ESPboard.19 | length 25.6
  Bottom Layer w0.254: Main-ESPboard.19 160.816,70.197 IDC.10
"PWM 13": IDC.8 Main-ESPboard.3 | length 23.6
  Bottom Layer w0.254: Main-ESPboard.3 159.421,69.052 IDC.8
"PWM 14": IDC.6 P?.17 | length 73.5
  Top Layer w0.254: P?.17 128.016,9.779 128.016,11.811 129.032,12.827 133.188,12.827 168.233,47.872 168.233,58.898 165.536,61.595 IDC.6
"PWM 15": IDC.4 P?.3 | length 70.5
  Top Layer w0.254: v1(126.619,21.717) 126.619,23.622 149.86,46.863 152.146,46.863 IDC.4
  Bottom Layer w0.254: P?.3 126.577,9.971 126.577,10.164 126.744,10.331 126.744,15.928 126.619,16.053 126.619,21.675 v1@126.577,21.717
"PWM 16": IDC.2 P?.2 | length 70.9
  Top Layer w0.254: P?.2 120.529,7.185 120.529,13.722 151.13,44.323 156.337,44.323 164.158,52.144 164.158,56.335 IDC.2
pads on no net: BNO.JP1_2 BNO.JP1_6 BNO.JP2_1 BNO.JP2_2 BNO.JP2_3 BNO.JP2_4 BNO.JP2_5 BNO.JP2_6 Comms. Comms.3 Comms.4 Comms.8 IDC.19 IDC.20 LoRa. LoRa.1 LoRa.2 LoRa.3 LoRa.4 LoRa.6 LoRa.7 LoRa.8 Main-ESPboard.11 Main-ESPboard.45 Main-ESPboard.46 P?.6 P?.M1 P?.M2 R-Pi. R-Pi.6 xtra-controls.02 xtra-controls.06 xtra-controls.08 xtra-controls.10 xtra-controls.14 xtra-controls.16 xtra-controls.18 xtra-controls.20
copper on no net:
  other v2: 29.464,4.445 172.339,4.953 171.069,122.936
  other v3: 29.972,122.936

## Polygon pours and split planes (outlines as drawn)
GND on Top Layer "GND_L01_P000" (solid, pour order 0): 25.5,126.5 25.5,1.5 177.5,1.5 177.5,126.5

## Other copper
Top Layer:
  pour cut-out: 178,5 177.5,5 cw(c174,5) 174,1.5 174,1 177.96,1 178,1.04
  pour cut-out: 29,1 29,1.5 cw(c29,5) 25.5,5 25,5 25,1.04 25.04,1
  pour cut-out: 25,123 25.5,123 cw(c29,123) 29,126.5 29,127 25.04,127 25,126.96
  pour cut-out: 174,127 174,126.5 cw(c174,123) 177.5,123 178,123 178,126.96 177.96,127
  pour cut-out: 138.557,11.049 152.908,11.049 152.908,5.588 138.557,5.588 138.557,10.795
  pour cut-out: 167.64,77.597 167.64,73.025 172.666,73.025 172.78,77.597
  pour cut-out: 132.334,10.795 116.713,10.795 116.713,5.842 132.334,5.842
  pour cut-out: 138.176,96.266 141.859,96.266 141.859,78.359 138.176,78.359
  pour cut-out: 137.414,61.722 142.24,61.722 142.24,74.93 137.414,74.93

## Silkscreen, mask and mechanical layers (free items; w line width, h text height)
Top Overlay:
  lines w0.254: 96.774,122.301 125.73,122.301 125.73,101.219 97.155,101.219 97.155,121.92
  text "Toggle ESP-to-Rpi" at 99.06,123.444 h1.52
  text "ESP" at 116.713,119.634 h1.52
  text "ESP" at 101.981,119.38 h1.52
  text "12v" at 44.45,118.618 h1
  text "rx" at 53.975,118.491 h1
  text "GND" at 47.879,118.364 h1
  text "12v" at 42.672,108.585 h1
  text "GND" at 46.609,108.585 h1
  text "tx" at 55.118,108.331 h1
  text "Rpi" at 102.616,102.489 h1.52
  text "Rpi" at 116.713,102.235 h1.52
  text "-" at 91.059,97.409 h1.52
  text "+12" at 80.391,96.901 h1.52
  text "+5" at 80.518,90.17 h1.52
  text "-" at 91.44,89.535 h1.52
  text "5v PWR" at 108.458,70.993 h1 r90
  text "GND" at 42.672,70.231 h1
  text "GND" at 43.815,60.198 h1
  text "I2C" at 107.823,35.052 h1.52
  text "12v" at 104.267,29.464 h1
  text "SDA" at 110.49,29.464 h1
  text "SCL" at 114.173,29.464 h1
  text "SDA" at 93.218,29.083 h1
  text "SCL" at 96.901,29.083 h1
  text "Auxiliary ESP" at 125.73,3.302 h1.52
Bottom Overlay:
  drawing of 42 lines, arcs and shapes, not listed
  text "Schematics" at 54.845,23.768 h1
  text "Harsh Gupta" at 57.004,3.829 h1.52

## Text inside footprints (layer, text, board x,y; h text height)
Comms: Top Overlay "9" at 54.991,117.729 h1.27 r180; Top Overlay "8" at 52.072,117.732 h1.27 r180; Top Overlay "7" at 49.275,117.731 h1.27 r180; Top Overlay "6" at 46.479,117.732 h1.27 r180; Top Overlay "5" at 56.266,111.377 h1.27 r180; Top Overlay "4" at 53.472,111.375 h1.27 r180; Top Overlay "3" at 50.673,111.376 h1.27 r180; Top Overlay "2" at 47.875,111.375 h1.27 r180; Top Overlay "1" at 44.957,111.379 h1.27 r180
LoRa: Top Overlay "9" at 45.593,13.716 h1.27; Top Overlay "8" at 48.512,13.713 h1.27; Top Overlay "7" at 51.309,13.714 h1.27; Top Overlay "6" at 54.105,13.713 h1.27; Top Overlay "5" at 44.318,20.068 h1.27; Top Overlay "4" at 47.112,20.07 h1.27; Top Overlay "3" at 49.911,20.069 h1.27; Top Overlay "2" at 52.709,20.07 h1.27; Top Overlay "1" at 55.627,20.066 h1.27
P?: Mechanical 2 "PCB Edge" at 131.225,19.479 h1.02 r180
R-Pi: Top Overlay "9" at 45.593,61.912 h1.27; Top Overlay "8" at 48.512,61.909 h1.27; Top Overlay "7" at 51.309,61.911 h1.27; Top Overlay "6" at 54.105,61.909 h1.27; Top Overlay "5" at 44.318,68.264 h1.27; Top Overlay "4" at 47.112,68.267 h1.27; Top Overlay "3" at 49.911,68.265 h1.27; Top Overlay "2" at 52.709,68.267 h1.27; Top Overlay "1" at 55.627,68.263 h1.27